# Altium PCB YGL_Y1.PcbDoc (part 2 of 2)
Units mm, origin at the board's own origin, x right, y up, seen from the top; angles counter-clockwise.
Board outline 70 x 42.24 mm, 4 copper layers (Top Layer 1, layer1, layer2, Bottom Layer 1), stack 0.603 mm thick; 162 components, 114 nets, 466 pads, 244 vias.
Unrouted connection lines stored in the file: 91.
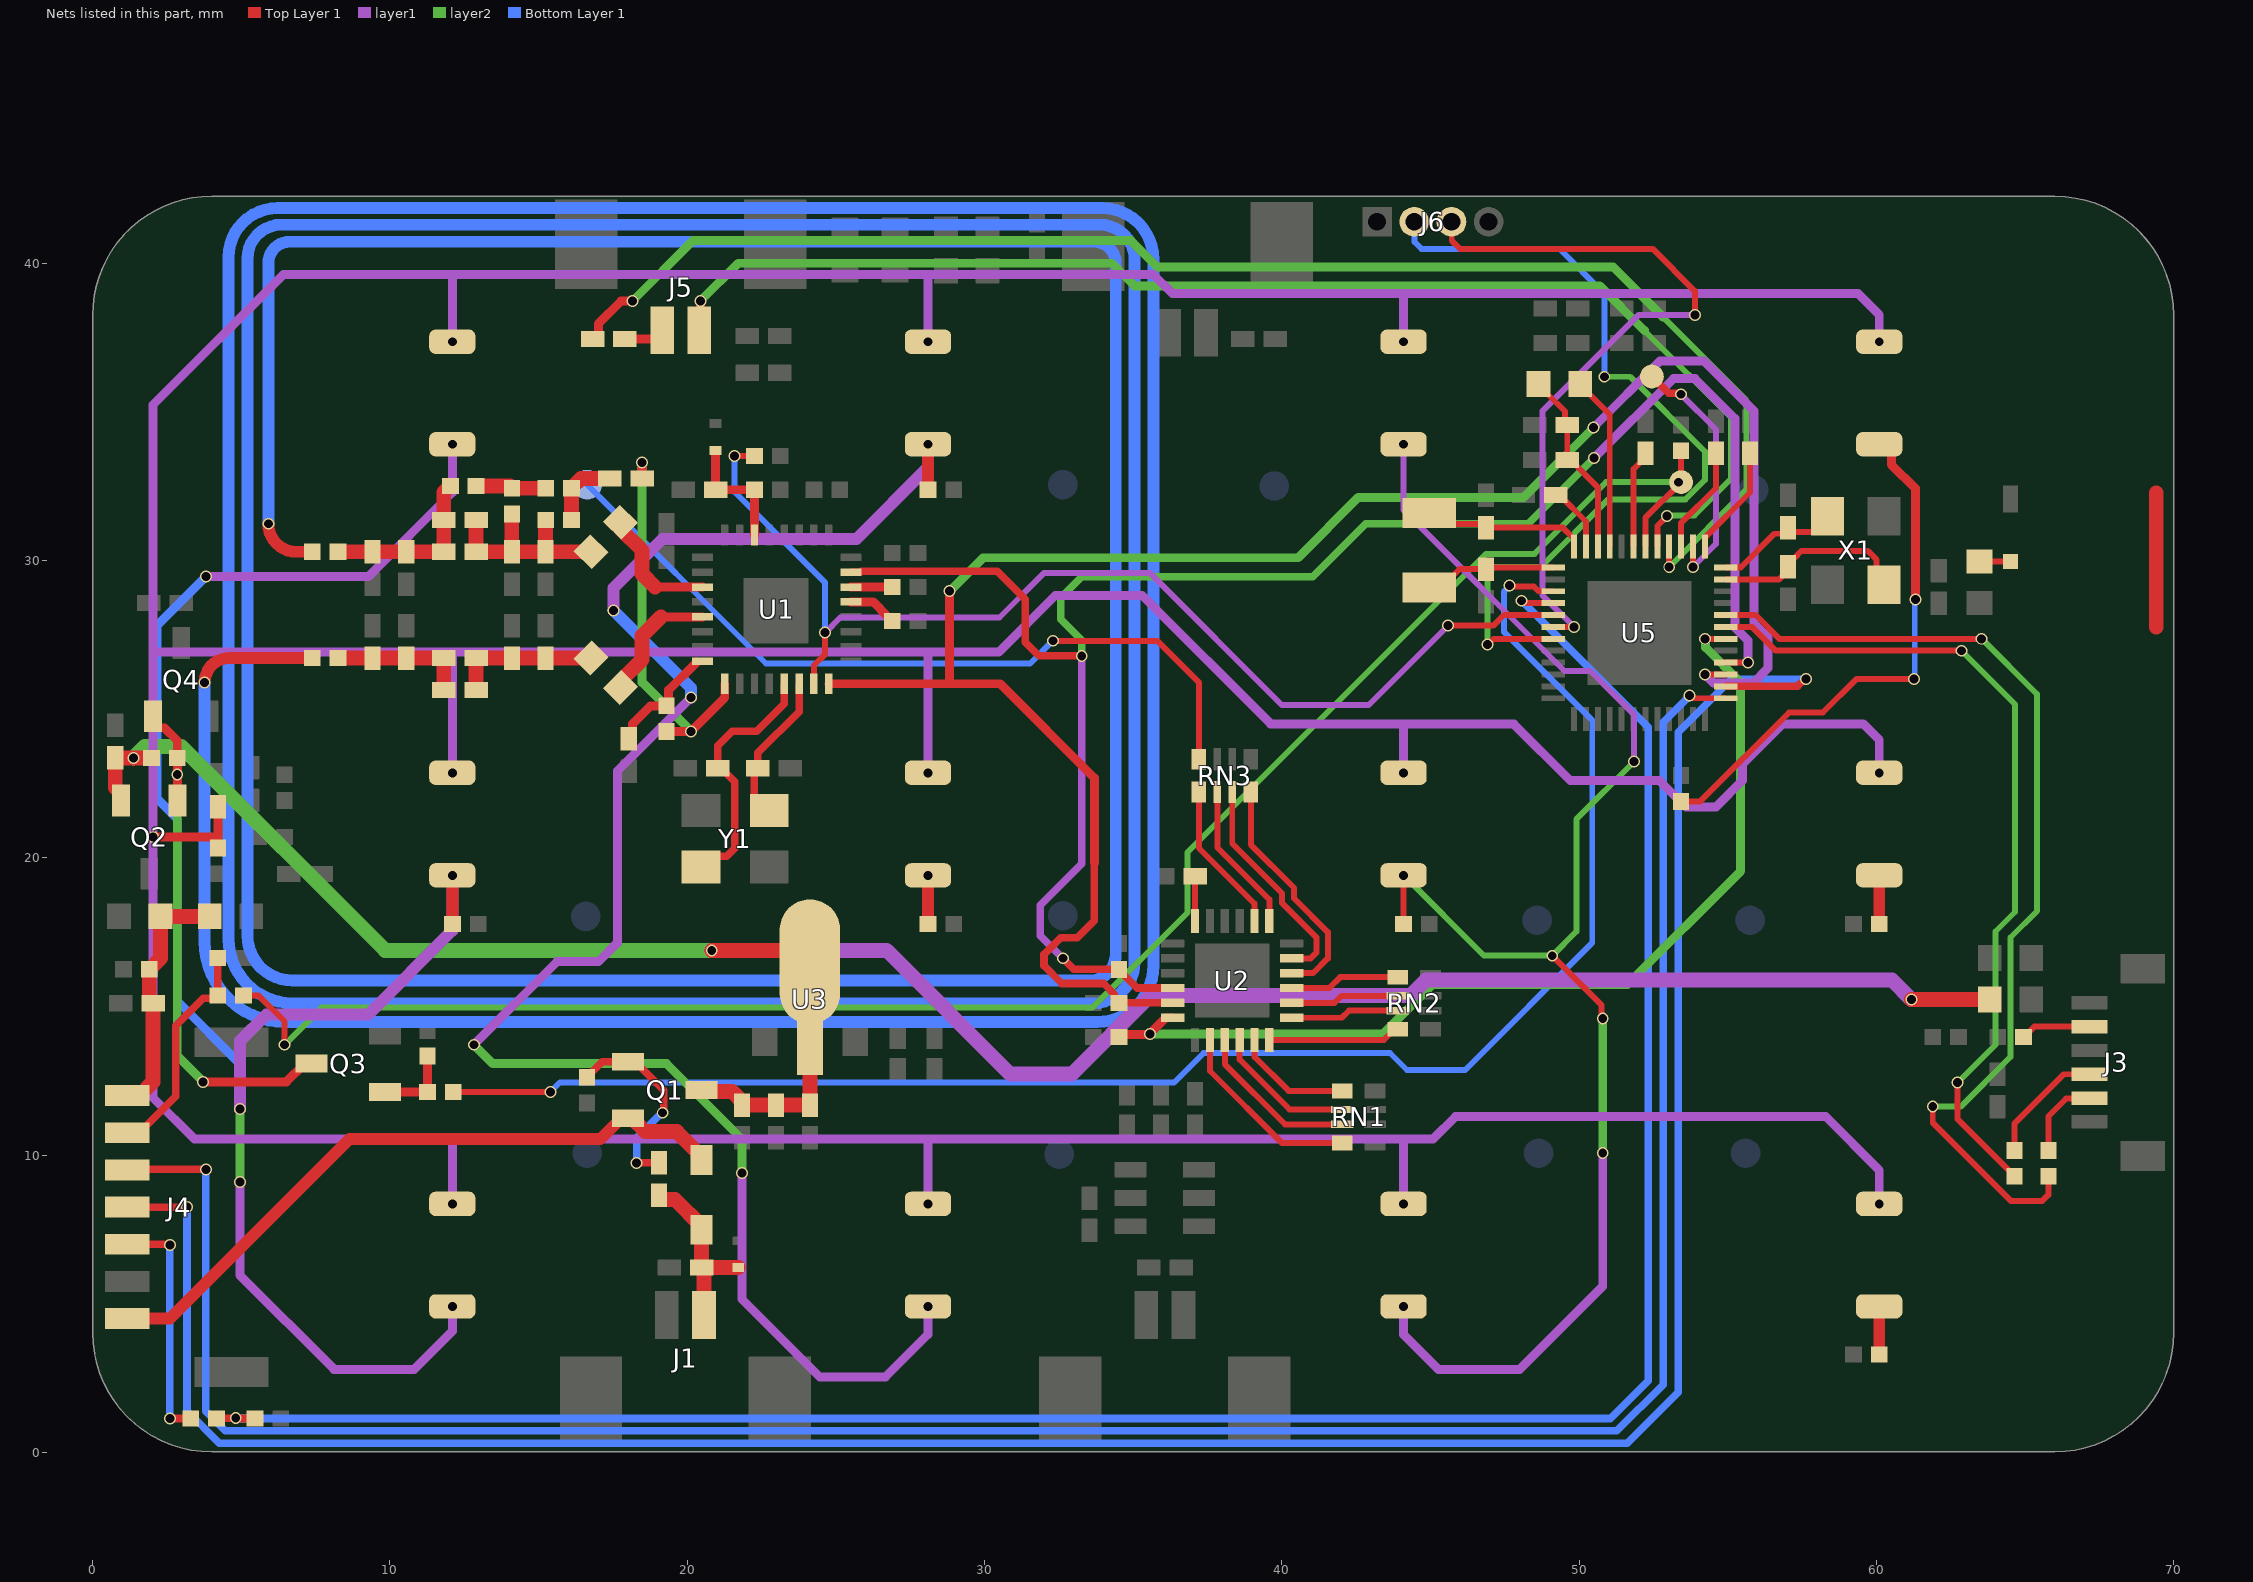
[diagram p4: the nets of this part, all layers, seen from the top]

## Via types
v1: diameter 0.4, hole 0.3, Top Layer 1 to Bottom Layer 1, tented both sides, 244 vias

## Nets (pads, with @x,y where several pads share a name; then routed paths per layer and width w, separated by ;. In a path a pad name is that pad's centre, name@x,y a point inside that pad or via, vN(x,y) a via of type N, cw(c..) or ccw(c..) an arc to the next point about the centre after c; other vN are vias at no path point) (continued)
NetC7_1: C7.1 R4.1 U1.17 | length 13.2
  Top Layer 1 w0.3: v1(18.484,33.303) 18.484,32.772 C7.1@18.489,32.766 ; R4.1@19.304,24.257 v1(20.134,24.257) 21.265,25.388 U1.17@21.265,25.861
  layer2 w0.3: v1(18.484,33.303) 18.484,25.907 v1(20.134,24.257)
NetC7_2: C7.2 R5.2 R10.1 | length 2.5
  Top Layer 1 w0.5: R10.1@16.105,31.369 R5.2@16.105,32.437 16.118,32.437 16.138,32.457 16.138,32.47 16.435,32.766 C7.2@17.399,32.766
NetC8_1: C8.1 C9.1 C10.2 C11.2 L3.2 R6.1 R10.2 | length 7.3
  Top Layer 1 w0.5: C9.1@12.901,31.369 C8.1@12.901,30.3 C10.2@14.101,30.3 ; R6.1@14.101,31.571 C10.2@14.101,30.3 ; R10.2@15.24,31.369 C11.2@15.24,30.3 ; L3.2@16.764,30.3 16.741,30.323 16.529,30.323 16.507,30.3 C11.2@15.24,30.3 ; C10.2@14.101,30.3 C11.2@15.24,30.3
NetC14_2: C14.2 U2.18 | length 1.5
  Top Layer 1 w0.2: U2.18@37.085,17.875 C14.2@37.085,19.385
NetC17_1: C17.1 C18.1 C22.1 C24.1 L4.2 | length 5
  Top Layer 1 w0.5: C24.1@12.901,25.654 C22.1@12.901,26.723 C17.1@14.101,26.723 C18.1@15.24,26.723 16.507,26.723 16.529,26.7 16.741,26.7 L4.2@16.764,26.723
NetC23_2: C23.2 D1.2 R14.2 U1.6 | length 4.2
  Top Layer 1 w0.3: D1.2@20.955,33.708 C23.2@20.955,32.385 R14.2@22.265,32.385 U1.6@22.265,30.861
NetC31_2: C31.2 Q1.1 R17.2 | length 6.9
  Top Layer 1 w0.254: R17.2@16.637,12.625 16.637,12.638 17.141,13.142 Q1.1@18.014,13.142 18.249,13.142 19.205,12.186 19.205,11.932 19.205,11.458 v1(19.177,11.43) ; v1(18.299,9.741) C31.2@19.05,9.741 C31.2@19.05,9.866
  Bottom Layer 1 w0.254: v1(18.299,9.741) 18.299,10.591 19.137,11.43 v1(19.177,11.43)
NetC32_2: C32.2 U1.22 Y1.1 | length 5.2
  Top Layer 1 w0.254: Y1.1@22.764,21.597 22.676,21.597 22.253,22.02 22.253,22.895 C32.2@22.376,23.018 22.376,23.537 23.765,24.926 U1.22@23.765,25.861
NetC33_2: C33.2 U1.21 Y1.3 | length 8.6
  Top Layer 1 w0.254: Y1.3@20.464,19.697 20.828,20.061 21.331,20.061 21.6,20.33 21.6,22.57 21.152,23.018 C33.2@21.027,23.018 21.027,23.768 21.516,24.257 22.335,24.257 23.265,25.187 U1.21@23.265,25.861
NetC36_1: C36.1 U5.13 | length 3.8
  Top Layer 1 w0.2: U5.13@54.234,30.472 54.234,30.772 55.753,32.291 C36.1@55.753,33.606
NetC37_1: C37.1 U5.15 | length 3.6
  Top Layer 1 w0.2: U5.15@53.434,30.472 53.434,31.271 54.61,32.447 C37.1@54.61,33.606
NetC40_2: C40.2 U5.11 X1.3 | length 6.7
  Top Layer 1 w0.2: U5.11@54.934,29.372 56.734,29.372 57.026,29.664 57.026,29.914 57.196,30.084 57.238,30.084 57.484,30.331 59.709,30.331 60.015,30.025 60.015,29.44 X1.3@60.262,29.193
NetC41_2: C41.2 U5.12 X1.1 | length 4.3
  Top Layer 1 w0.2: U5.12@54.934,29.772 55.441,29.772 56.573,30.905 56.856,30.905 57.026,31.075 C41.2@57.026,31.105 57.174,30.957 57.912,30.957 58.362,31.407 X1.1@58.362,31.493
NetC42_1: C42.1 U5.19 | length 3.3
  Top Layer 1 w0.2: U5.19@51.834,30.472 51.834,33.081 52.234,33.481 C42.1@52.234,33.606
NetC49_2: C49.2 C50.2 L11.1 U5.22 | length 6.4
  Top Layer 1 w0.2: L11.1@48.641,35.941 48.641,35.909 48.941,35.609 49.534,35.016 49.534,34.633 C49.2@49.604,34.563 C50.2@49.604,33.38 49.729,33.38 50.634,32.475 U5.22@50.634,30.472
NetC54_2: C54.2 U5.24 X2.2 | length 5.5
  Top Layer 1 w0.2: X2.2@44.966,31.6 45.329,31.237 46.746,31.237 C54.2@46.871,31.112 49.456,31.112 49.796,30.772 49.834,30.772 U5.24@49.834,30.472
NetC57_2: C57.2 U5.25 X2.1 | length 4.4
  Top Layer 1 w0.2: X2.1@44.966,29.1 45.366,29.1 45.981,29.715 C57.2@46.871,29.715 46.928,29.772 U5.25@49.134,29.772
NetC58_1: C58.1 LED1.1 LED2.1 LED3.1 LED4.1 LED5.1 LED6.1 LED7.1 LED8.1 LED9.1 LED10.1 LED#1.1 LED*1.1 R40.2 | length 236.1
  Top Layer 1 w0.3: v1(2.032,20.701) 4.212,20.701 ; R40.2@4.212,20.332 4.212,20.701 ; C58.1@4.212,21.717 4.212,20.701
  layer1 w0.3: v1(12.1,8.364) 12.1,10.532 12.109,10.541 ; v1(12.1,22.864) 12.1,26.915 12.109,26.924 ; v1(12.1,37.364) 12.1,39.615 12.109,39.624 ; v1(28.1,8.364) 28.1,10.532 28.109,10.541 ; v1(28.1,22.864) 28.1,26.924 ; v1(28.1,37.364) 28.1,39.615 28.109,39.624 ; v1(44.1,8.364) 44.1,10.532 44.109,10.541 ; v1(44.1,22.864) 44.1,24.502 ; v1(44.1,37.364) 44.1,38.98 44.109,38.989 ; v1(60.1,8.364) 60.1,9.496 58.293,11.303 45.847,11.303 45.085,10.541 44.109,10.541 ; v1(60.1,22.864) 60.1,23.974 59.563,24.511 56.859,24.511 55.499,23.151 55.499,22.606 54.61,21.717 53.594,21.717 52.705,22.606 49.707,22.606 47.811,24.502 44.1,24.502 ; v1(60.1,37.364) 60.1,38.268 59.379,38.989 44.109,38.989 ; 2.032,26.924 12.109,26.924 ; 2.032,26.924 2.032,35.238 6.418,39.624 12.109,39.624 ; 2.032,26.924 v1(2.032,20.701) 2.032,11.938 3.429,10.541 12.109,10.541 ; 12.109,10.541 28.109,10.541 ; 12.109,26.924 28.1,26.924 ; 12.109,39.624 28.109,39.624 ; 28.1,26.924 30.478,26.924 32.383,28.829 35.306,28.829 39.624,24.511 44.109,24.511 44.1,24.502 ; 28.109,10.541 44.109,10.541 ; 28.109,39.624 35.687,39.624 36.322,38.989 44.109,38.989
NetJ3_2: J3.2 R19.1 | length 2.8
  Top Layer 1 w0.2: R19.1@65.786,10.16 65.786,11.303 66.384,11.901 67.149,11.901 J3.2@67.171,11.923
NetJ3_3: J3.3 R20.1 | length 4.1
  Top Layer 1 w0.2: R20.1@64.643,10.16 64.643,11.06 66.306,12.723 J3.3@67.171,12.723
NetJ3_5: J3.5 R22.2 | length 2.4
  Top Layer 1 w0.2: R22.2@64.949,13.97 64.962,13.97 65.315,14.323 J3.5@67.171,14.323
NetJ4_3: J4.3 R25.2 | length 8
  Top Layer 1 w0.254: J4.3@1.171,7.005 2.58,7.005 v1(2.6,6.985) ; v1(2.6,1.143) R25.2@3.302,1.143
  Bottom Layer 1 w0.254: v1(2.6,1.143) v1(2.6,6.985)
NetL3_1: L3.1 U1.11 | length 4.3
  Top Layer 1 w0.3: 18.923,29.111 U1.11@20.515,29.111
  Top Layer 1 w0.5: L3.1@17.754,31.29 17.754,31.078 18.484,30.348 18.484,29.55 18.923,29.111
NetL4_1: L4.1 U1.13 | length 4.3
  Top Layer 1 w0.3: 19.122,28.111 U1.13@20.515,28.111
  Top Layer 1 w0.5: L4.1@17.754,25.733 17.754,25.945 18.484,26.675 18.484,27.473 19.122,28.111
NetL11_2: L11.2 U5.21 | length 5.9
  Top Layer 1 w0.2: L11.2@50.041,35.941 50.041,35.909 51.034,34.916 U5.21@51.034,30.472
NetLED1_2: LED1.2 LED2.2 LED3.2 R37.2 | length 60.7
  Top Layer 1 w0.4: LED2.2@12.1,19.416 v1(12.105,19.411) 12.105,17.785 R37.2@12.109,17.78
  layer1 w0.3: v1(3.81,29.464) 9.271,29.464 12.1,32.293 v1(12.1,33.916) ; v1(4.953,9.1) 4.953,5.967 8.126,2.794 10.813,2.794 12.1,4.081 v1(12.1,4.916)
  layer1 w0.4: v1(4.953,11.557) 4.953,13.843 5.842,14.732 9.271,14.732 12.105,17.566 v1(12.105,19.411)
  layer2 w0.3: v1(4.953,9.1) v1(4.953,11.557)
  Bottom Layer 1 w0.3: v1(3.81,29.464) 2.159,27.813 2.159,22.001 2.846,21.314 2.846,15.188 4.953,13.081 v1(4.953,11.557)
NetLED4_2: LED4.2 LED6.2 R36.2 | length 59.4
  Top Layer 1 w0.4: R36.2@28.1,32.385 v1(28.1,33.916)
  layer1 w0.3: v1(12.827,13.716) 15.621,16.51 17.018,16.51 17.653,17.145 17.653,22.919 v1(20.134,25.4) ; v1(21.844,9.398) 21.844,5.159 24.463,2.54 26.67,2.54 28.1,3.97 v1(28.1,4.916)
  layer1 w0.4: v1(17.526,28.321) 17.526,29.083 19.177,30.734 25.699,30.734 28.1,33.135 v1(28.1,33.916)
  layer2 w0.3: v1(12.827,13.716) 13.462,13.081 19.304,13.081 21.844,10.541 v1(21.844,9.398)
  Bottom Layer 1 w0.4: v1(17.526,28.321) 20.134,25.713 v1(20.134,25.4)
NetLED5_2: LED5.2 R35.2 | length 1.6
  Top Layer 1 w0.4: R35.2@28.1,17.78 v1(28.1,19.416)
NetLED7_2: LED7.2 LED8.2 LED9.2 R34.2 | length 50.9
  Top Layer 1 w0.2: R34.2@44.1,17.78 v1(44.1,19.416) ; v1(49.099,16.711) 50.762,15.049 50.762,14.643 v1(50.8,14.605)
  layer1 w0.2: v1(44.1,33.916) 44.1,31.7 49.511,26.289 50.38,26.289 51.854,24.815 v1(51.854,23.242)
  layer1 w0.3: v1(44.1,4.916) 44.1,3.96 45.266,2.794 48.006,2.794 50.8,5.588 v1(50.8,10.07)
  layer2 w0.2: v1(44.1,19.416) 46.804,16.711 v1(49.099,16.711) 49.912,17.525 49.912,21.301 v1(51.854,23.242)
  layer2 w0.3: v1(50.8,10.07) v1(50.8,14.605)
NetLED10_2: LED10.2 R31.2 | length 1.6
  Top Layer 1 w0.4: R31.2@60.1,17.78 LED10.2@60.1,19.416
NetLED#1_2: LED#1.2 R29.2 | length 18.1
  Top Layer 1 w0.2: R29.2@53.434,21.903 54.078,21.903 57.067,24.892 58.204,24.892 59.328,26.016 v1(61.266,26.016)
  Top Layer 1 w0.3: LED#1.2@60.1,33.916 60.257,33.916 60.51,33.663 60.51,33.234 61.321,32.424 v1(61.321,28.699)
  Bottom Layer 1 w0.2: v1(61.266,26.016) 61.293,26.044 61.293,28.672 v1(61.321,28.699)
NetLED*1_2: LED*1.2 R32.2 | length 1.6
  Top Layer 1 w0.4: R32.2@60.1,3.302 LED*1.2@60.1,4.916
NetQ3_1: Q3.1 R30.2 R33.1 | length 2.6
  Top Layer 1 w0.3: Q3.1@9.836,12.131 R30.2@11.268,12.131 R33.1@11.268,13.335
NetR5_1: R5.1 R6.2 R7.2 | length 2.4
  Top Layer 1 w0.5: R7.2@12.901,32.512 14.039,32.512 14.101,32.45 R6.2@14.101,32.437 R5.1@15.24,32.437
NetR11_2: R11.2 R15.2 | length 331.1
  Top Layer 1 w0.4: v1(3.768,25.908) cw(c4.583,25.908) 4.583,26.723 R15.2@7.389,26.723 ; v1(5.91,31.242) ccw(c6.852,31.242) 6.852,30.3 R11.2@7.389,30.3
  Bottom Layer 1 w0.4: v1(3.768,25.908) 3.768,17.187 ccw(c6.477,17.187) 6.477,14.478 33.782,14.478 ccw(c33.782,16.383) 35.687,16.383 35.687,40.132 ccw(c33.959,40.132) 33.959,41.86 27.858,41.86 6.223,41.86 ccw(c6.223,40.209) 4.572,40.209 4.572,17.272 ccw(c6.731,17.272) 6.731,15.113 33.655,15.113 ccw(c33.655,16.51) 35.052,16.51 35.052,40.132 ccw(c33.883,40.132) 33.883,41.301 6.35,41.301 ccw(c6.35,40.158) 5.207,40.158 5.207,17.399 ccw(c6.731,17.399) 6.731,15.875 33.528,15.875 ccw(c33.528,16.764) 34.417,16.764 34.417,40.005 ccw(c33.694,40.005) 33.694,40.728 6.631,40.728 ccw(c6.631,40.007) 5.91,40.007 v1(5.91,31.242)
NetR12_2: R12.2 U1.29 | length 1.7
  Top Layer 1 w0.3: U1.29@25.515,28.611 26.255,28.611 26.765,28.101 26.765,28.088 26.885,27.968 R12.2@26.898,27.968
NetR13_2: R13.2 U1.30 | length 1.4
  Top Layer 1 w0.3: U1.30@25.515,29.111 R13.2@26.898,29.111
NetRN1_1: RN1.1 U2.5 | length 4
  Top Layer 1 w0.2: U2.5@39.085,13.875 39.085,13.311 40.232,12.164 RN1.1@42.037,12.164
NetRN1_2: RN1.2 U2.4 | length 4.8
  Top Layer 1 w0.2: U2.4@38.585,13.875 38.585,13.218 40.264,11.539 RN1.2@42.037,11.539
NetRN1_3: RN1.3 U2.3 | length 5.6
  Top Layer 1 w0.2: U2.3@38.085,13.875 38.085,13.065 40.111,11.039 RN1.3@42.037,11.039
NetRN1_4: RN1.4 U2.2 | length 6.5
  Top Layer 1 w0.2: U2.2@37.585,13.875 37.585,12.834 40.005,10.414 RN1.4@42.037,10.414
NetRN2_1: RN2.1 U2.9 | length 3.7
  Top Layer 1 w0.2: U2.9@40.335,15.625 41.603,15.625 41.966,15.988 RN2.1@43.9,15.988
NetRN2_2: RN2.2 U2.8 | length 3.7
  Top Layer 1 w0.2: U2.8@40.335,15.125 41.774,15.125 42.012,15.363 RN2.2@43.9,15.363
NetRN2_3: RN2.3 U2.7 | length 3.7
  Top Layer 1 w0.2: U2.7@40.335,14.625 42.024,14.625 42.262,14.863 RN2.3@43.9,14.863
NetRN2_4: RN2.4 U2.6 | length 4.5
  Top Layer 1 w0.2: U2.6@39.585,13.875 43.437,13.875 43.8,14.238 RN2.4@43.9,14.238
NetRN3_1: RN3.1 U2.14 | length 5.1
  Top Layer 1 w0.2: RN3.1@37.21,22.218 37.21,20.335 39.085,18.46 U2.14@39.085,17.875
NetRN3_2: RN3.2 U2.13 | length 5.1
  Top Layer 1 w0.2: RN3.2@37.835,22.218 37.835,20.353 39.585,18.603 U2.13@39.585,17.875
NetRN3_3: RN3.3 U2.11 | length 7.5
  Top Layer 1 w0.2: RN3.3@38.335,22.218 38.335,20.485 40.017,18.803 40.017,18.48 41.164,17.333 41.164,16.812 40.976,16.625 U2.11@40.335,16.625
NetRN3_4: RN3.4 U2.10 | length 8.1
  Top Layer 1 w0.2: RN3.4@38.96,22.218 38.96,20.446 40.414,18.993 40.414,18.645 41.553,17.505 41.553,16.625 41.053,16.125 U2.10@40.335,16.125
NetTP1_1: TP1.1 U5.14 | length 8.5
  Top Layer 1 w0.2: v1(53.834,29.789) U5.14@53.834,30.472
  Top Layer 1 w0.254: TP1.1@52.451,36.195 53.02,35.626 53.401,35.626 v1(53.429,35.598)
  layer1 w0.2: v1(53.429,35.598) 54.61,34.417 54.61,30.565 v1(53.834,29.789)
NX: P12.1 RN3.8 | length 26.5
  Top Layer 1 w0.2: v1(32.301,27.305) 35.814,27.305 37.21,25.909 RN3.8@37.21,23.318
  Bottom Layer 1 w0.2: P12.1@16.637,32.558 22.652,26.543 31.539,26.543 v1(32.301,27.305)
ON-PW: Q2.1 Q3.3 Q4.1 R28.2 | length 17.9
  Top Layer 1 w0.3: Q4.1@2.032,24.765 2.032,24.53 2.182,24.38 2.417,24.38 2.846,23.951 R28.2@2.846,23.368 2.85,23.363 v1@2.85,22.793 ; v1(2.846,22.802) 2.85,22.797 2.85,21.941 Q2.1@2.855,21.936 ; v1(3.719,12.466) 6.516,12.466 7.131,13.081 Q3.3@7.366,13.081
  layer2 w0.3: v1(2.846,22.802) 2.846,13.34 v1(3.719,12.466)
ON_OFF: R30.1 U5.27 | length 55.8
  Top Layer 1 w0.2: R30.1@12.134,12.131 v1(15.404,12.131) ; v1(47.659,29.167) 47.697,29.128 48.486,29.128 48.642,28.972 U5.27@49.134,28.972
  Bottom Layer 1 w0.2: v1(15.404,12.131) 15.719,12.446 36.381,12.446 37.375,13.44 43.642,13.44 44.217,12.866 46.17,12.866 50.446,17.142 50.446,24.632 47.473,27.605 47.473,28.949 47.659,29.135 v1(47.659,29.167)
P-IRQ: R16.2 U1.23 U5.29 | length 38.2
  Top Layer 1 w0.2: v1(21.595,33.524) R16.2@22.265,33.524 ; U1.23@24.265,25.861 24.265,26.481 24.641,26.858 v1(24.641,27.58) ; v1(45.593,27.813) 47.114,27.813 47.473,28.172 U5.29@49.134,28.172
  layer1 w0.2: v1(24.641,27.58) 25.149,28.088 30.505,28.088 32.008,29.591 35.56,29.591 40.005,25.146 42.926,25.146 v1(45.593,27.813)
  Bottom Layer 1 w0.2: v1(21.595,33.524) 21.595,32.309 24.641,29.262 v1(24.641,27.58)
RF: ANT1.2 L7.2 | length 1
  Top Layer 1 w0.2: L7.2@63.473,29.972 ANT1.2@64.516,29.972
RF_IRQ: J4.6 R21.1 R23.1 | length 7.6
  Top Layer 1 w0.254: J4.6@1.171,10.755 1.571,10.755 2.794,11.978 2.794,14.351 3.719,15.276 4.121,15.276 R21.1@4.212,15.367 R23.1@4.212,16.637
RF_PW: C35.1 J4.7 L8.2 L9.1 R18.2 | length 8.6
  Top Layer 1 w0.5: J4.7@1.171,12.005 1.571,12.005 2.032,12.466 C35.1@2.032,15.113 1.925,15.113 1.905,15.133 R18.2@1.905,16.256 1.918,16.256 2.286,16.624 L8.2@2.286,18.034 L9.1@3.937,18.034
RSTP: R21.2 R27.1 TP2.1 U5.18 | length 62.2
  Top Layer 1 w0.2: R21.2@5.078,15.367 5.588,15.367 6.458,14.497 v1(6.458,13.715) ; U5.18@52.234,30.472 52.234,31.439 TP2.1@53.434,32.639 R27.1@53.434,33.697
  layer2 w0.2: v1(6.458,13.715) 7.706,14.963 33.632,14.963 36.83,18.161 36.83,20.19 46.866,30.226 48.496,30.226 50.909,32.639 v1(53.34,32.639)
RX0: J4.4 U5.2 | length 90.2
  Top Layer 1 w0.254: J4.4@1.171,8.255 v1(3.175,8.255) ; U5.2@54.934,25.772 57.35,25.772 57.594,26.016 v1(57.633,26.016)
  Bottom Layer 1 w0.254: v1(3.175,8.255) 3.175,1.397 4.26,0.312 51.62,0.312 53.34,2.032 53.34,24.235 55.121,26.016 v1(57.633,26.016)
RXD: R20.2 U5.7 | length 28.3
  Top Layer 1 w0.2: U5.7@54.934,27.772 55.815,27.772 56.614,26.973 62.862,26.973 v1(62.865,26.97) ; v1(62.738,12.446) 62.738,11.212 64.643,9.307 R20.2@64.643,9.294
  layer2 w0.2: v1(62.738,12.446) 64.008,13.716 64.008,17.526 64.666,18.184 64.666,25.169 v1(62.865,26.97)
SCL: R1.1 U1.31 U2.22 U5.4 | length 62.7
  Top Layer 1 w0.2: U5.4@54.934,26.572 v1(55.682,26.572)
  Top Layer 1 w0.254: U1.31@25.515,29.611 25.517,29.613 25.815,29.613 25.854,29.652 30.423,29.652 31.372,28.702 31.372,27.254 31.83,26.797 v1(33.274,26.797) ; v1(32.639,16.625) 33.012,16.252 R1.1@34.525,16.252 34.525,16.239 35.139,15.625 U2.22@36.335,15.625
  layer1 w0.254: v1(32.639,16.625) 31.877,17.387 31.877,18.415 33.274,19.812 v1(33.274,26.797)
  layer1 w0.3: v1(50.507,33.455) 53.181,36.129 53.899,36.129 55.245,34.783 55.245,27.756 55.682,27.319 v1(55.682,26.572)
  layer2 w0.254: v1(33.274,26.797) 33.274,27.324 32.564,28.033 32.564,28.754 33.274,29.464 41.05,29.464 42.828,31.242 48.294,31.242 v1(50.507,33.455)
SDA: R2.1 U1.24 U2.23 U5.3 | length 68.6
  Top Layer 1 w0.2: v1(54.236,26.172) U5.3@54.934,26.172
  Top Layer 1 w0.254: 33.699,19.83 33.699,17.894 33.123,17.317 32.565,17.317 32.004,16.757 32.004,16.379 32.606,15.777 34.008,15.777 34.369,15.415 34.369,15.268 34.512,15.125 R2.1@34.525,15.125 U2.23@36.335,15.125
  Top Layer 1 w0.3: U1.24@24.765,25.861 28.829,25.861 ; v1(28.829,28.974) 28.829,25.861 ; 33.699,19.83 33.699,22.689 30.527,25.861 28.829,25.861
  layer1 w0.3: v1(50.488,34.479) 52.721,36.712 54.211,36.712 55.88,35.043 55.88,27.901 56.356,27.425 56.356,26.381 55.855,25.88 54.528,25.88 v1(54.236,26.172)
  layer2 w0.3: v1(28.829,28.974) 29.954,30.099 40.549,30.099 42.581,32.131 48.14,32.131 v1(50.488,34.479)
SETUP: R25.1 R26.1 U5.28 | length 78.4
  Top Layer 1 w0.2: v1(48.067,28.651) 48.121,28.651 48.202,28.57 48.633,28.57 48.635,28.572 U5.28@49.134,28.572
  Top Layer 1 w0.254: R25.1@4.168,1.143 4.176,1.151 4.806,1.151 v1(4.814,1.16) ; v1@4.814,1.143 R26.1@5.461,1.143
  Bottom Layer 1 w0.254: v1(4.814,1.16) 4.831,1.143 51.054,1.143 52.324,2.413 52.324,24.394 v1(48.067,28.651)
SP+: CE1.1 U5.16 | length 50
  Top Layer 1 w0.2: v1(53.034,29.789) U5.16@53.034,30.472
  Top Layer 1 w0.3: CE1.1@16.817,37.464 16.893,37.464 17.013,37.584 17.013,37.968 17.78,38.735 v1(18.161,38.735)
  layer2 w0.2: 52.832,38.192 55.626,35.398 55.626,32.381 v1(53.034,29.789)
  layer2 w0.3: v1(18.161,38.735) 20.193,40.767 34.925,40.767 35.814,39.878 51.146,39.878 52.832,38.192
SP-: J5.2 U5.17 | length 44.2
  Top Layer 1 w0.2: U5.17@52.634,30.472 52.634,31.165 v1(52.966,31.497)
  Top Layer 1 w0.3: J5.2@20.409,37.746 20.447,37.784 v1(20.447,38.735)
  layer2 w0.2: 52.197,37.742 55.118,34.821 55.118,32.766 53.878,31.526 52.996,31.526 v1(52.966,31.497)
  layer2 w0.3: v1(20.447,38.735) 21.717,40.005 34.29,40.005 35.052,39.243 50.696,39.243 52.197,37.742
SPK-IN: CE1.2 J5.1 | length 1.4
  Top Layer 1 w0.3: CE1.2@17.907,37.464 18.909,37.464 19.159,37.714 J5.1@19.159,37.746
SWDCLK: J6.2 U5.31 | length 29.3
  Top Layer 1 w0.2: v1(46.915,27.178) 46.938,27.178 47.133,27.372 U5.31@49.134,27.372
  layer2 w0.2: v1(46.915,27.178) 46.915,29.556 47.149,29.789 48.712,29.789 50.986,32.063 53.584,32.063 54.235,32.714 54.235,33.673 51.721,36.187 v1(50.851,36.187)
  Bottom Layer 1 w0.2: J6.2@44.46,41.402 44.472,41.39 44.472,40.719 44.708,40.484 49.351,40.484 50.851,38.984 v1(50.851,36.187)
SWDIO: J6.3 U5.30 | length 25.2
  Top Layer 1 w0.2: J6.3@45.71,41.402 45.72,41.392 45.72,40.767 45.999,40.488 52.476,40.488 53.899,39.065 v1(53.899,38.268) ; U5.30@49.134,27.772 v1(49.834,27.772)
  layer1 w0.2: v1(49.834,27.772) 48.768,28.838 48.768,35.03 52.006,38.268 v1(53.899,38.268)
TOH_IRQ: R3.1 U2.24 U5.6 | length 33.3
  Top Layer 1 w0.2: v1(54.236,27.372) U5.6@54.934,27.372
  Top Layer 1 w0.3: R3.1@34.538,13.982 R3.1@34.525,13.982 34.603,14.06 35.552,14.06 v1(35.571,14.079) 35.571,14.101 36.095,14.625 U2.24@36.335,14.625
  layer2 w0.3: v1(35.571,14.079) 43.416,14.079 45.085,15.748 51.632,15.748 55.439,19.555 55.439,25.897 54.255,27.081 54.255,27.353 v1(54.236,27.372)
TX0: J4.5 U5.1 | length 85.5
  Top Layer 1 w0.2: v1(53.721,25.461) 53.775,25.461 53.864,25.372 U5.1@54.934,25.372
  Top Layer 1 w0.254: J4.5@1.171,9.505 1.191,9.525 v1(3.81,9.525)
  Bottom Layer 1 w0.254: v1(3.81,9.525) 3.81,1.381 4.46,0.731 51.277,0.731 52.832,2.286 52.832,24.572 v1(53.721,25.461)
TX+: C19.1 C20.1 C22.2 C24.2 R15.1 | length 4.6
  Top Layer 1 w0.5: R15.1@8.255,26.723 C20.1@9.408,26.723 C19.1@10.551,26.723 C22.2@11.811,26.723 C24.2@11.811,25.654
TX-: C8.2 C9.2 C12.2 C13.2 R7.1 R11.1 | length 5.9
  Top Layer 1 w0.5: R11.1@8.255,30.3 C13.2@9.408,30.3 C12.2@10.551,30.3 C8.2@11.811,30.3 C9.2@11.811,31.369 11.811,32.3 12.023,32.512 R7.1@12.036,32.512
TXD: R19.2 U5.8 | length 33.7
  Top Layer 1 w0.2: U5.8@54.934,28.172 55.942,28.172 56.742,27.372 v1(63.543,27.372) ; v1(61.9,11.633) 61.9,11.092 64.529,8.464 65.582,8.464 65.786,8.667 R19.2@65.786,9.294
  layer2 w0.2: v1(61.9,11.633) 62.839,11.633 64.516,13.31 64.516,17.324 65.405,18.213 65.405,25.51 v1(63.543,27.372)
V_POW: C15.1 C16.1 C29.1 C47.1 L10.1 Q1.3 Q2.2 R28.1 U3.2 | length 81.2
  Top Layer 1 w0.5: Q2.2@0.955,21.936 0.955,22.171 0.762,22.364 C47.1@0.762,23.368 v1(1.371,23.368) R28.1@1.98,23.368 ; Q1.3@20.484,12.192 20.534,12.142 21.511,12.142 21.844,11.809 C29.1@21.844,11.684 C16.1@22.987,11.684 C15.1@24.13,11.684 U3.2@24.13,13.97 ; v1(20.828,16.891) 23.749,16.891 U3.2@24.13,16.51 ; v1(61.181,15.24) L10.1@63.816,15.24
  layer1 w0.5: v1(20.828,16.891) 26.71,16.891 30.872,12.729 32.933,12.729 35.57,15.367 44.323,15.367 44.845,15.889 60.532,15.889 v1(61.181,15.24)
  layer2 w0.5: v1(1.371,23.368) 1.752,23.749 2.983,23.749 9.841,16.891 v1(20.828,16.891)
VBAT: J4.1 Q1.2 VD1.2 | length 22.8
  Top Layer 1 w0.4: J4.1@1.171,4.505 2.6,4.505 8.636,10.541 17.078,10.541 17.779,11.242 Q1.2@18.014,11.242
  Top Layer 1 w0.5: Q1.2@18.014,11.242 18.249,11.242 18.299,11.192 18.299,11.088 18.592,10.795 19.652,10.795 20.359,10.088 20.359,9.963 VD1.2@20.484,9.838
VDDIO: C51.1 U5.23 | length 2.2
  Top Layer 1 w0.2: C51.1@49.223,32.202 49.348,32.202 50.234,31.317 U5.23@50.234,30.472
VIN: C30.1 C31.1 J1.1 TVS3.2 VD1.1 | length 6.2
  Top Layer 1 w0.5: C31.1@19.05,8.651 19.05,8.526 19.07,8.506 19.596,8.506 20.484,7.618 VD1.1@20.484,7.493 C30.1@20.484,6.223 C30.1@20.544,6.223 ; J1.1@20.564,4.625 20.564,6.203 C30.1@20.544,6.223 ; TVS3.2@21.717,6.223 C30.1@20.544,6.223
VMID: C6.1 R4.2 U1.16 | length 3.9
  Top Layer 1 w0.3: C6.1@18.034,24.003 18.154,24.123 18.154,24.504 18.76,25.11 R4.2@19.291,25.11 ; R4.2@19.304,25.123 R4.2@19.291,25.11 ; U1.16@20.315,26.586 19.372,25.643 19.372,25.191 R4.2@19.291,25.11
pads on no net: J4.8 U1.8 U1.25 U1.26 U1.27 U2.12 U2.15 U2.16 U2.19 U2.20 U5.33 U5.35 U5.36 U5.42 U5.43

## Polygon pours and split planes (outlines as drawn)
GND on Bottom Layer 1 (solid, pour order 16): 0.003,4.022 0.003,38.259 cw(c4.003,38.259) 4.003,42.259 66.003,42.259 cw(c66.003,38.259) 70.003,38.259 70.003,4.022 cw(c66.003,4.022) 66.003,0.022 4.003,0.022 cw(c4.003,4.022)
N1 on Bottom Layer 1 "Bottom Layer 1-N1" (solid, pour order 11): 38.604,3.996 38.604,9.632 cw(c40.104,9.632) 40.104,11.132 48.153,11.132 cw(c48.153,9.632) 49.653,9.632 49.653,3.996 cw(c48.153,3.996) 48.153,2.496 40.104,2.496 cw(c40.104,3.996)
N# on Bottom Layer 1 "Bottom Layer 1-N#" (solid, pour order 1): 22.604,32.996 22.604,38.632 cw(c24.104,38.632) 24.104,40.132 32.153,40.132 cw(c32.153,38.632) 33.653,38.632 33.653,32.996 cw(c32.153,32.996) 32.153,31.496 24.104,31.496 cw(c24.104,32.996)
N0 on Bottom Layer 1 "Bottom Layer 1-N0" (solid, pour order 3): 38.604,32.996 38.604,38.632 cw(c40.104,38.632) 40.104,40.132 48.153,40.132 cw(c48.153,38.632) 49.653,38.632 49.653,32.996 cw(c48.153,32.996) 48.153,31.496 40.104,31.496 cw(c40.104,32.996)
N9 on Bottom Layer 1 "Bottom Layer 1-N9" (solid, pour order 4): 54.604,32.996 54.604,38.632 cw(c56.104,38.632) 56.104,40.132 64.153,40.132 cw(c64.153,38.632) 65.653,38.632 65.653,32.996 cw(c64.153,32.996) 64.153,31.496 56.104,31.496 cw(c56.104,32.996)
N8 on Bottom Layer 1 "Bottom Layer 1-N8" (solid, pour order 6): 38.604,18.496 38.604,24.132 cw(c40.104,24.132) 40.104,25.632 48.153,25.632 cw(c48.153,24.132) 49.653,24.132 49.653,18.496 cw(c48.153,18.496) 48.153,16.996 40.104,16.996 cw(c40.104,18.496)
N4 on Bottom Layer 1 "Bottom Layer 1-N4" (solid, pour order 9): 6.604,3.996 6.604,9.632 cw(c8.104,9.632) 8.104,11.132 16.153,11.132 cw(c16.153,9.632) 17.653,9.632 17.653,3.996 cw(c16.153,3.996) 16.153,2.496 8.104,2.496 cw(c8.104,3.996)
N6 on Bottom Layer 1 "Bottom Layer 1-N6" (solid, pour order 7): 22.604,18.496 22.604,24.132 cw(c24.104,24.132) 24.104,25.632 32.153,25.632 cw(c32.153,24.132) 33.653,24.132 33.653,18.496 cw(c32.153,18.496) 32.153,16.996 24.104,16.996 cw(c24.104,18.496)
N5 on Bottom Layer 1 "Bottom Layer 1-N5" (solid, pour order 8): 6.604,18.496 6.604,24.132 cw(c8.104,24.132) 8.104,25.632 16.153,25.632 cw(c16.153,24.132) 17.653,24.132 17.653,18.496 cw(c16.153,18.496) 16.153,16.996 8.104,16.996 cw(c8.104,18.496)
NX on Bottom Layer 1 "Bottom Layer 1-NX" (solid, pour order 0): 6.604,32.996 6.604,38.632 cw(c8.104,38.632) 8.104,40.132 16.153,40.132 cw(c16.153,38.632) 17.653,38.632 17.653,32.996 cw(c16.153,32.996) 16.153,31.496 8.104,31.496 cw(c8.104,32.996)
N2 on Bottom Layer 1 "Bottom Layer 1-N2" (solid, pour order 12): 54.604,3.996 54.604,9.632 cw(c56.104,9.632) 56.104,11.132 64.153,11.132 cw(c64.153,9.632) 65.653,9.632 65.653,3.996 cw(c64.153,3.996) 64.153,2.496 56.104,2.496 cw(c56.104,3.996)
N3 on Bottom Layer 1 "Bottom Layer 1-N3" (solid, pour order 10): 22.604,3.996 22.604,9.632 cw(c24.104,9.632) 24.104,11.132 32.153,11.132 cw(c32.153,9.632) 33.653,9.632 33.653,3.996 cw(c32.153,3.996) 32.153,2.496 24.104,2.496 cw(c24.104,3.996)
N7 on Bottom Layer 1 "Bottom Layer 1-N7" (solid, pour order 5): 54.604,18.496 54.604,24.132 cw(c56.104,24.132) 56.104,25.632 64.153,25.632 cw(c64.153,24.132) 65.653,24.132 65.653,18.496 cw(c64.153,18.496) 64.153,16.996 56.104,16.996 cw(c56.104,18.496)
GND on layer2 (solid, pour order 15): 0.003,4.022 0.003,38.259 cw(c4.003,38.259) 4.003,42.259 66.003,42.259 cw(c66.003,38.259) 70.003,38.259 70.003,4.022 cw(c66.003,4.022) 66.003,0.022 4.003,0.022 cw(c4.003,4.022)
GND on layer1 (solid, pour order 14): 0.003,4.022 0.003,38.259 cw(c4.003,38.259) 4.003,42.259 66.003,42.259 cw(c66.003,38.259) 70.003,38.259 70.003,4.022 cw(c66.003,4.022) 66.003,0.022 4.003,0.022 cw(c4.003,4.022)
GND on Top Layer 1 (solid, pour order 13): 0.003,4.022 0.003,38.259 cw(c4.003,38.259) 4.003,42.259 66.003,42.259 cw(c66.003,38.259) 70.003,38.259 70.003,4.022 cw(c66.003,4.022) 66.003,0.022 4.003,0.022 cw(c4.003,4.022)

## Keep-outs
Keep-Out Layer:
  lines w0.127: 0.003,4.022 ccw(c4.003,4.022) 4.003,0.022 ; 0.003,4.022 ccw(c4.003,4.022) 4.003,0.022 ; 0.003,4.022 0.003,38.259 ; 0.003,4.022 0.003,38.259 ; 0.003,38.259 cw(c4.003,38.259) 4.003,42.259 ; 0.003,38.259 cw(c4.003,38.259) 4.003,42.259 ; 4.003,0.022 66.003,0.022 ; 4.003,0.022 66.003,0.022 ; 4.003,42.259 66.003,42.259 ; 4.003,42.259 66.003,42.259 ; 66.003,0.022 ccw(c66.003,4.022) 70.003,4.022 ; 66.003,0.022 ccw(c66.003,4.022) 70.003,4.022 ; 66.003,42.259 cw(c66.003,38.259) 70.003,38.259 ; 66.003,42.259 cw(c66.003,38.259) 70.003,38.259 ; 70.003,4.022 70.003,38.259 ; 70.003,4.022 70.003,38.259

## Other copper
Top Layer 1:
  rectangle net GND: 62.2,0.635 66.802,1.806
  rectangle net 3V3: 49.553,37.02 51.846,38.753
  rectangle net DVDD: 23.633,30.501 24.395,31.215
  rectangle net GND: 9.129,27.813 16.764,29.21
  pour cut-out: 64.135,-2.032 64.135,46.482 70.866,46.482 70.866,-2.032
layer1:
  pour cut-out: 64.135,-2.032 64.135,46.482 70.866,46.482 70.866,-2.032
layer2:
  pour cut-out: 64.135,-2.032 64.135,46.482 70.866,46.482 70.866,-2.032
Bottom Layer 1:
  rectangle net GND: 9.129,27.813 16.764,29.21
  pour cut-out: 64.135,-2.032 64.135,46.482 70.866,46.482 70.866,-2.032
  pour cut-out: 54.604,6.433 54.604,6.941 56.603,6.941 56.603,6.433
  pour cut-out: 38.604,6.433 38.604,6.941 40.603,6.941 40.603,6.433
  pour cut-out: 22.604,6.433 22.604,6.941 24.603,6.941 24.603,6.433
  pour cut-out: 6.604,6.433 6.604,6.941 8.603,6.941 8.603,6.433
  pour cut-out: 6.604,20.933 6.604,21.441 8.603,21.441 8.603,20.933
  pour cut-out: 22.604,20.933 22.604,21.441 24.603,21.441 24.603,20.933
  pour cut-out: 38.604,20.933 38.604,21.441 40.603,21.441 40.603,20.933
  pour cut-out: 54.604,20.933 54.604,21.441 56.603,21.441 56.603,20.933
  pour cut-out: 54.604,35.433 54.604,35.941 56.603,35.941 56.603,35.433
  pour cut-out: 38.446,35.553 38.446,36.061 40.445,36.061 40.445,35.553
  pour cut-out: 22.604,35.433 22.604,35.941 24.603,35.941 24.603,35.433
  pour cut-out: 6.604,35.433 6.604,35.941 8.603,35.941 8.603,35.433
  pour cut-out: 58.783,3.872 58.783,9.481 61.436,9.481 61.436,3.872
  pour cut-out: 42.783,3.872 42.783,9.481 45.436,9.481 45.436,3.872
  pour cut-out: 26.783,3.872 26.783,9.481 29.436,9.481 29.436,3.872
  pour cut-out: 10.783,3.872 10.783,9.481 13.436,9.481 13.436,3.872
  pour cut-out: 10.783,18.372 10.783,23.981 13.436,23.981 13.436,18.372
  pour cut-out: 26.783,18.372 26.783,23.981 29.436,23.981 29.436,18.372
  pour cut-out: 42.783,18.372 42.783,23.981 45.436,23.981 45.436,18.372
  pour cut-out: 58.783,18.372 58.783,23.981 61.436,23.981 61.436,18.372
  pour cut-out: 58.783,32.872 58.783,38.481 61.436,38.481 61.436,32.872
  pour cut-out: 42.783,32.872 42.783,38.481 45.436,38.481 45.436,32.872
  pour cut-out: 26.783,32.872 26.783,38.481 29.436,38.481 29.436,32.872
  pour cut-out: 10.783,32.872 10.783,38.481 13.436,38.481 13.436,32.872

## Silkscreen, mask and mechanical layers (free items; w line width, h text height)
Top Overlay:
  text "调试" at 48.766,40.477 h3.05
  text "喇叭" at 11.88,40.016 h2.54
  text "防拆" at 32.283,36.352 h2.54
  text "电源输入" at 6.588,10.796 h2.54 r270
  text "指纹" at 67.527,9.145 h2.54 r270
  text "电机" at 40.719,1.206 h2.54
  text "USB" at 24.49,0.918 h3.05
Bottom Overlay:
  text "6" at 50.409,35.382 h5.08 r270
  text "3" at 65.955,35.179 h5.08 r270
  text "#" at 17.949,34.925 h5.08 r270
  text "9" at 33.951,34.925 h5.08 r270
  text "5" at 49.953,20.447 h5.08 r270
  text "2" at 65.913,20.447 h5.08 r270
  text "0" at 17.949,20.193 h5.08 r270
  text "8" at 35.932,19.725 h5.08 r270
  text "*" at 16.703,6.096 h5.08 r270
  text "7" at 33.909,5.969 h5.08 r270
  text "4" at 49.911,5.842 h5.08 r270
  text "1" at 66.04,5.588 h5.08 r270
Mechanical 1:
  lines w0.127: 0.003,4.022 ccw(c4.003,4.022) 4.003,0.022 ; 0.003,4.022 ccw(c4.003,4.022) 4.003,0.022 ; 0.003,4.022 0.003,38.259 ; 0.003,4.022 0.003,38.259 ; 0.003,38.259 cw(c4.003,38.259) 4.003,42.259 ; 0.003,38.259 cw(c4.003,38.259) 4.003,42.259 ; 4.003,0.022 66.003,0.022 ; 4.003,0.022 66.003,0.022 ; 4.003,42.259 66.003,42.259 ; 4.003,42.259 66.003,42.259 ; 66.003,0.022 ccw(c66.003,4.022) 70.003,4.022 ; 66.003,0.022 ccw(c66.003,4.022) 70.003,4.022 ; 66.003,42.259 cw(c66.003,38.259) 70.003,38.259 ; 66.003,42.259 cw(c66.003,38.259) 70.003,38.259 ; 70.003,4.022 70.003,38.259 ; 70.003,4.022 70.003,38.259

## Text inside footprints (layer, text, board x,y; h text height)
LED1: Top Overlay "+" at 11.13,36.708 h1.52 r180
LED2: Top Overlay "+" at 11.13,22.208 h1.52 r180
LED3: Top Overlay "+" at 11.13,7.708 h1.52 r180
LED4: Top Overlay "+" at 27.13,36.708 h1.52 r180
LED5: Top Overlay "+" at 27.13,22.208 h1.52 r180
LED6: Top Overlay "+" at 27.13,7.708 h1.52 r180
LED7: Top Overlay "+" at 43.13,36.708 h1.52 r180
LED8: Top Overlay "+" at 43.13,22.208 h1.52 r180
LED9: Top Overlay "+" at 43.13,7.708 h1.52 r180
LED10: Top Overlay "+" at 59.13,22.208 h1.52 r180
LED#1: Top Overlay "+" at 59.13,36.708 h1.52 r180
LED*1: Top Overlay "+" at 59.13,7.708 h1.52 r180